# Altium PCB Business_Card.PcbDoc (part 2 of 2)
Units mm, origin at the board's own origin, x right, y up, seen from the top; angles counter-clockwise.
Board outline 85 x 55 mm, 4 copper layers (Top Layer (RF), Inner1 (GND), Inner2 (Signal), Bottom Layer (VCC)), stack 0.786 mm thick; 94 components, 61 nets, 338 pads, 147 vias.
Unrouted connection lines stored in the file: 1.
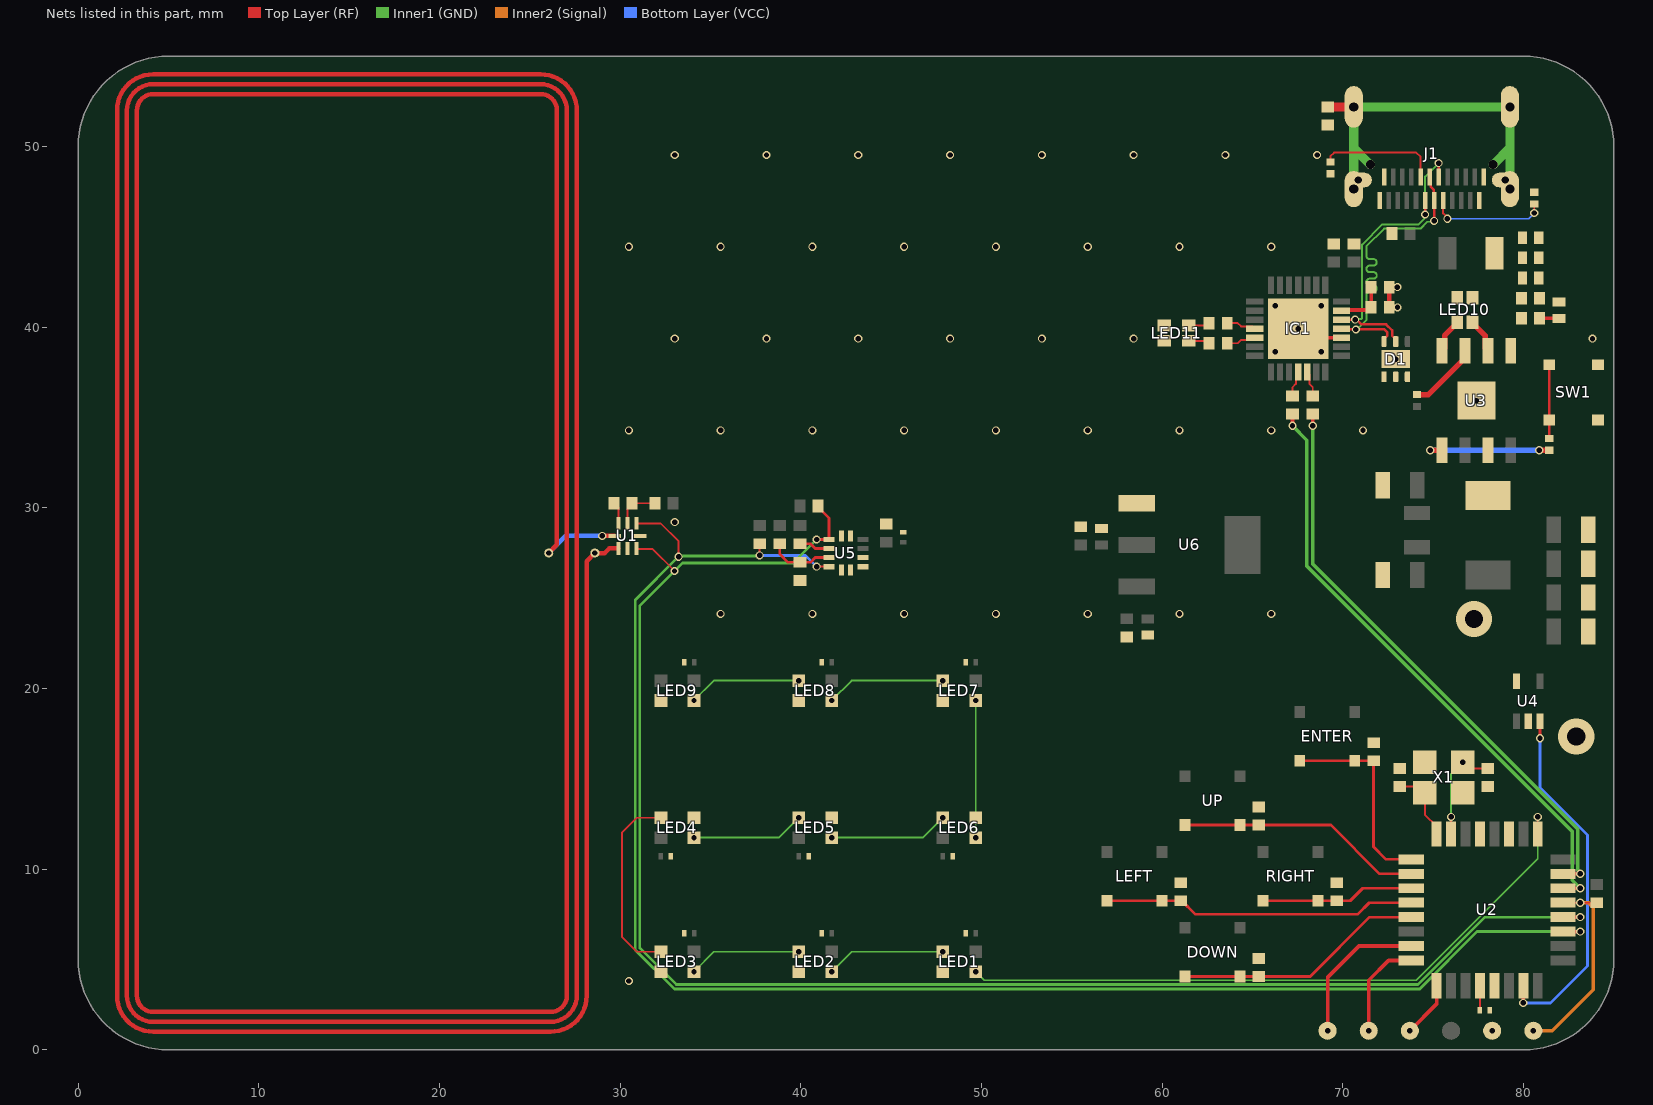
[diagram p4: the nets of this part, all layers, seen from the top]

## Via types
v1: diameter 0.45, hole 0.3, Top Layer (RF) to Bottom Layer (VCC), tented both sides, 143 vias
v2: diameter 2, hole 1, Top Layer (RF) to Bottom Layer (VCC), 4 vias

## Nets (pads, with @x,y where several pads share a name; then routed paths per layer and width w, separated by ;. In a path a pad name is that pad's centre, name@x,y a point inside that pad or via, vN(x,y) a via of type N, cw(c..) or ccw(c..) an arc to the next point about the centre after c; other vN are vias at no path point) (continued)
CHASIS: C19.1 J1.SH1 J1.SH2 J1.SH3 J1.SH4 J1.SH5 J1.SH6 | length 21.8
  Top Layer (RF) w0.508: C19.1@69.164,52.197 J1.SH4@70.607,52.197
  Inner1 (GND) w0.508: J1.SH2@70.607,47.647 70.608,49.917 ; J1.SH6@71.528,48.997 70.608,49.917 ; J1.SH5@78.328,48.997 79.248,49.917 ; J1.SH1@79.247,47.647 79.248,49.917 ; 70.608,49.917 J1.SH4@70.607,52.197 J1.SH3@79.247,52.197 79.248,49.917
D0: R3.1 U2.30 | length 33.8
  Top Layer (RF) w0.203: v1(67.217,34.542) R3.1@67.217,35.187 ; U2.30@82.19,8.944 U2.30@82.192,8.943 v1(83.14,8.943)
  Inner1 (GND) w0.203: v1(67.217,34.542) 68.01,33.749 68.01,26.784 82.702,12.091 82.702,9.381 v1(83.14,8.943)
D1: R2.1 U2.31 | length 32.5
  Top Layer (RF) w0.203: v1(68.334,34.542) R2.1@68.334,35.187 ; U2.31@82.19,9.744 U2.31@82.192,9.743 v1(83.14,9.743)
  Inner1 (GND) w0.203: v1(68.334,34.542) 68.334,26.89 83.007,12.217 83.007,9.943 83.14,9.81 v1(83.14,9.743)
D_N: D1.2 IC1.5 J1.A7 J1.B7 | length 17.2
  Top Layer (RF) w0.137: IC1.5@69.926,40.418 IC1.5@69.926,40.418 70.682,40.42 v1(70.684,40.421) ; v1@70.683,40.418 70.771,40.418 71.03,40.159 72.397,40.159 72.735,39.82 72.735,39.519 72.82,39.434 72.847,39.434 72.928,39.353 D1.2@72.928,39.207 ; v1(74.553,46.239) J1.A7@74.553,47.022 ; J1.B7@75.302,48.322 v1(75.302,49.08)
  Inner1 (GND) w0.109: v1(70.684,40.421) 70.706,40.444 71.02,40.444 71.072,40.495 71.072,42.566 71.072,43.301 71.072,44.576 72.19,45.695 74.203,45.695 74.488,45.979 74.488,46.174 v1(74.553,46.239) 74.553,48.331 v1(75.302,49.08)
D_P: D1.3 IC1.4 J1.A6 J1.B6 | length 17.5
  Top Layer (RF) w0.137: IC1.4@69.926,39.918 69.949,39.895 70.703,39.895 v1(70.726,39.871) 70.749,39.895 72.288,39.895 72.471,39.711 72.471,39.546 72.278,39.353 D1.3@72.278,39.207 ; J1.B6@74.802,48.322 74.858,48.266 74.858,47.791 75.031,47.617 75.031,47.042 J1.A6@75.052,47.022 ; v1(75.053,45.883) J1.A6@75.052,47.022
  Inner1 (GND) w0.109: v1(70.726,39.871) 70.781,39.871 71.307,40.397 71.307,41.359 71.307,41.777 cw(c71.489,41.777) 71.489,41.958 71.698,41.958 ccw(c71.698,42.139) 71.698,42.321 71.489,42.321 cw(c71.489,42.502) 71.489,42.683 71.698,42.683 ccw(c71.698,42.865) 71.698,43.046 71.489,43.046 cw(c71.489,43.227) 71.489,43.409 71.696,43.409 ccw(c71.696,43.59) 71.696,43.771 71.489,43.771 cw(c71.489,43.953) 71.307,43.953 71.307,44.478 72.288,45.459 74.3,45.459 74.679,45.837 75.003,45.837 75.005,45.835 v1(75.053,45.883)
DOWN: DOWN.2 R16.2 U2.13 | length 13.9
  Top Layer (RF) w0.152: DOWN.2@61.264,4.06 DOWN.2@64.314,4.06 R16.2@65.354,4.06 68.198,4.06 71.481,7.343 U2.13@73.792,7.343
ENTER: ENTER.2 R17.2 U2.9 | length 11.2
  Top Layer (RF) w0.152: ENTER.2@67.614,15.998 ENTER.2@70.664,15.998 R17.2@71.704,15.998 71.704,11.238 72.4,10.543 U2.9@73.792,10.543
FD: U1.4
GND: C1.2 C2.2 C3.2 C4.2 C5.2 C6.2 C7.2 C8.2 C9.2 C10.2 C11.2 C12.2 C13.2 C14.2 C15.2 C16.2 C17.2 C18.2 C19.2 C20.2 C21.2 C22.2 C23.2 C24.2 C25.2 C26.2 C27.2 C28.2 C29.2 C30.2 C31.2 C32.2 C33.2 C34.2 C35.2 D1.4 D1.5 D1.6 D1.7 IC1.3 IC1.29 J1.A1 J1.A12 J1.B1 J1.B12 LED1.2 LED2.2 LED3.2 LED4.2 LED5.2 LED6.2 LED7.2 LED8.2 LED9.2 LED10.3 LED10.4 LED11.3 LED11.4 PT3.1 R8.2 R9.2 R13.1 R14.1 R15.1 R16.1 R17.1 R23.1 SW1.2 U1.2 U2.3 U2.5 U2.21 U3.9 U4.2 U4.5 U5.5 U5.6 U5.7 U5.8 U6.1 X1.2 X1.4 | length 4.7
  Top Layer (RF) w0.203: v1(67.526,39.918) 68.026,39.418 IC1.3@69.926,39.418
  Top Layer (RF) w0.25: C29.2@72.559,42.226 72.564,42.221 C29.2@72.567,42.221 ; v1(73.02,42.216) 73.015,42.221 C29.2@72.567,42.221 ; v1(73.028,41.093) 73.023,41.098 72.572,41.098 C28.2@72.567,41.103 C29.2@72.567,42.221
  other v1: 78.267,1.056 30.48,3.81 35.56,24.13 40.64,24.13 45.72,24.13 50.8,24.13 55.88,24.13 60.96,24.13 66.04,24.13 33.02,29.21 30.48,34.29 35.56,34.29 40.64,34.29 45.72,34.29 50.8,34.29 55.88,34.29 60.96,34.29 66.04,34.29 71.12,34.29 77.39,35.919 72.928,38.232 66.256,38.648 68.796,38.648 33.02,39.37 38.1,39.37 43.18,39.37 48.26,39.37 53.34,39.37 58.42,39.37 83.82,39.37 66.256,41.188 68.796,41.188 30.48,44.45 35.56,44.45 40.64,44.45 45.72,44.45 50.8,44.45 55.88,44.45 60.96,44.45 66.04,44.45 33.02,49.53 38.1,49.53 43.18,49.53 48.26,49.53 53.34,49.53 58.42,49.53 63.5,49.53 68.58,49.53
  other v2: 82.923,17.348 77.256,23.851
INT1: U5.12
INT2: U5.11
KEY: R6.1 U3.5 | length 7.2
  Top Layer (RF) w0.305: v1(74.844,33.191) U3.5@75.489,33.191 ; v1(80.877,33.191) R6.1@81.4,33.191
  Bottom Layer (VCC) w0.305: v1(74.844,33.191) v1(80.877,33.191)
L1: LED10.2 U3.2 | length 1.9
  Top Layer (RF) w0.305: LED10.2@77.184,40.285 77.184,40.235 77.881,39.538 77.881,38.839 U3.2@78.029,38.691
L2: R5.2 U3.3 | length 3.9
  Top Layer (RF) w0.305: R5.2@74.113,36.268 74.736,36.268 76.759,38.291 U3.3@76.759,38.691
L3: LED10.1 U3.4 | length 1.9
  Top Layer (RF) w0.305: U3.4@75.489,38.691 75.636,38.839 75.636,39.538 76.334,40.235 LED10.1@76.334,40.285
LEFT: LEFT.2 R14.2 U2.12 | length 17.4
  Top Layer (RF) w0.152: LEFT.2@56.946,8.251 LEFT.2@59.996,8.251 R14.2@61.036,8.251 61.086,8.251 61.827,7.51 70.832,7.51 71.465,8.143 U2.12@73.792,8.143
MISO: PT5.1 U2.16 | length 5.6
  Top Layer (RF) w0.203: v1(71.436,1.056) 71.436,3.844 72.534,4.943 U2.16@73.792,4.943
MOSI: PT4.1 U2.15 | length 8.3
  Top Layer (RF) w0.203: v1(69.159,1.056) 69.159,4.002 70.9,5.743 U2.15@73.792,5.743
NetC13_1: C13.1 R4.2 | length 1.1
  Top Layer (RF) w0.203: R4.2@80.897,40.491 C13.1@81.97,40.491
NetIC1_18: IC1.18 R11.1 | length 1.7
  Top Layer (RF) w0.102: R11.1@63.602,40.227 64.184,40.227 64.368,40.042 65.001,40.042 IC1.18@65.126,39.918
NetIC1_19: IC1.19 R12.1 | length 1.7
  Top Layer (RF) w0.102: R12.1@63.602,39.109 64.184,39.109 64.368,39.294 65.001,39.294 IC1.19@65.126,39.418
NetJ1_A5: J1.A5 R8.1 | length 6.6
  Top Layer (RF) w0.102: J1.A5@75.552,47.022 75.553,46.302 75.788,46.067 v1(75.788,46.004) ; v1(80.597,46.32) R8.1@80.597,46.822
  Bottom Layer (VCC) w0.102: v1(75.788,46.004) 80.281,46.004 v1(80.597,46.32)
NetJ1_B5: J1.B5 R9.1 | length 6.6
  Top Layer (RF) w0.102: R9.1@69.317,49.147 69.317,49.469 69.514,49.667 74.063,49.667 74.303,49.427 J1.B5@74.302,48.322
NetL2_1: L2.1 U1.1 | length 1.4
  Top Layer (RF) w0.25: L2.1@28.6,27.5 29.145,27.5 29.398,27.753 U1.1@29.904,27.753
NetL2_2: L2.2 U1.8 | length 4.1
  Top Layer (RF) w0.25: v1(29.007,28.448) U1.8@29.709,28.448
  Bottom Layer (VCC) w0.25: v1(26.045,27.5) 26.993,28.448 v1(29.007,28.448)
  other v1: 28.6,27.5
NetLED1_1: LED1.1 LED2.3 | length 6.6
  Inner1 (GND) w0.102: v1(41.707,4.327) 42.807,5.427 v1(47.853,5.427)
NetLED2_1: LED2.1 LED3.3 | length 6.2
  Inner1 (GND) w0.102: v1(34.087,4.327) 35.187,5.427 v1(39.877,5.427)
NetLED3_1: LED3.1 LED4.3 | length 10.8
  Top Layer (RF) w0.102: LED3.1@32.257,5.427 30.921,5.427 30.099,6.248 30.099,12.014 30.928,12.844 LED4.3@32.257,12.844
NetLED4_1: LED4.1 LED5.3 | length 6.2
  Inner1 (GND) w0.102: v1(34.087,11.744) 38.777,11.744 v1(39.877,12.844)
NetLED5_1: LED5.1 LED6.3 | length 6.6
  Inner1 (GND) w0.102: v1(41.707,11.744) 46.753,11.744 v1(47.853,12.844)
NetLED6_1: LED6.1 LED7.3 | length 7.6
  Inner1 (GND) w0.102: v1(49.683,11.744) v1(49.683,19.338)
NetLED7_1: LED7.1 LED8.3 | length 6.6
  Inner1 (GND) w0.102: v1(41.707,19.338) 42.807,20.438 v1(47.853,20.438)
NetLED8_1: LED8.1 LED9.3 | length 6.2
  Inner1 (GND) w0.102: v1(34.087,19.338) 35.187,20.438 v1(39.877,20.438)
NetLED11_1: LED11.1 R12.2 | length 1.2
  Top Layer (RF) w0.102: LED11.1@61.478,39.243 62.468,39.243 R12.2@62.602,39.109
NetLED11_2: LED11.2 R11.2 | length 1.2
  Top Layer (RF) w0.102: LED11.2@61.478,40.093 62.468,40.093 R11.2@62.602,40.227
NetR1_1: R1.1 U1.7 | length 1.2
  Top Layer (RF) w0.102: R1.1@29.667,30.251 29.904,30.014 U1.7@29.904,29.143
NetR1_2: R1.2 R18.1 U1.6 | length 2.5
  Top Layer (RF) w0.102: U1.6@30.404,29.143 30.404,29.938 30.667,30.201 R1.2@30.667,30.251 ; R1.2@30.654,30.251 R1.2@30.667,30.251 ; R18.1@31.932,30.251 R1.2@30.667,30.251
NetR6_2: R6.2 SW1.1 | length 4.1
  Top Layer (RF) w0.152: R6.2@81.429,33.845 SW1.1@81.429,34.869 SW1.1@81.429,37.919
NetR19_2: R19.2 U5.2 | length 1.7
  Top Layer (RF) w0.152: R19.2@39.951,28.015 40.535,28.015 40.8,27.75 U5.2@41.563,27.75
NetR22_2: R22.2 R23.2 U5.3 | length 3.6
  Top Layer (RF) w0.152: R22.2@38.835,28.015 38.835,27.448 39.298,26.985 R23.2@39.951,26.985 40.535,26.985 40.8,27.25 U5.3@41.563,27.25
RIGHT: R15.2 RIGHT.2 U2.11 | length 8.5
  Top Layer (RF) w0.152: RIGHT.2@65.582,8.251 RIGHT.2@68.632,8.251 R15.2@69.672,8.251 70.412,8.251 71.104,8.943 U2.11@73.792,8.943
RST: PT1.1 R10.2 U2.29 | length 11.5
  Top Layer (RF) w0.102: U2.29@82.192,8.143 R10.2@84.049,8.143
  Inner2 (Signal) w0.203: v1(80.544,1.056) 81.6,1.056 83.864,3.32 83.864,7.879 83.602,8.141 v1(83.142,8.141)
RX: IC1.25 R3.2 | length 1.5
  Top Layer (RF) w0.102: R3.2@67.217,36.187 67.217,36.673 67.401,36.857 67.401,37.394 IC1.25@67.526,37.518
SCK: PT6.1 U2.17 | length 3.1
  Top Layer (RF) w0.203: v1(73.713,1.056) 75.192,2.535 U2.17@75.192,3.543
SCL: R20.2 U1.3 U2.28 U5.1 | length 91
  Top Layer (RF) w0.102: U1.3@30.904,27.753 30.941,27.753 30.963,27.731 31.781,27.731 v1(33.009,26.503)
  Top Layer (RF) w0.152: v1(40.87,28.25) U5.1@41.563,28.25 41.563,29.437 40.951,30.049 R20.2@40.951,30.099
  Top Layer (RF) w0.203: U2.28@82.19,7.344 U2.28@82.192,7.343 v1(83.14,7.343)
  Inner1 (GND) w0.152: v1(40.87,28.25) 39.569,26.949 33.455,26.949 31.09,24.584 31.09,5.637 33.107,3.619 74.152,3.619 77.875,7.343 v1(83.14,7.343)
SDA: R21.2 U1.5 U2.27 U5.4 | length 91
  Top Layer (RF) w0.102: U1.5@30.904,29.143 32.232,29.143 33.232,28.143 v1(33.232,27.296) ; v1(37.719,27.369) R21.2@37.719,28.015 ; v1(40.87,26.75) U5.4@41.563,26.75
  Top Layer (RF) w0.203: U2.27@82.19,6.544 U2.27@82.192,6.543 v1(83.14,6.543)
  Inner1 (GND) w0.152: v1(33.232,27.296) 30.836,24.9 30.836,5.532 33.002,3.365 74.257,3.365 77.434,6.543 v1(83.14,6.543) ; v1@33.268,27.333 37.682,27.333 v1(37.719,27.369)
  Bottom Layer (VCC) w0.152: v1(37.719,27.369) 40.251,27.369 v1(40.87,26.75)
SW: L1.1 U3.7
Temp: U2.23 U4.3 | length 20
  Top Layer (RF) w0.152: v1(80.915,17.248) U4.3@80.915,18.196
  Top Layer (RF) w0.203: v1(79.992,2.594) U2.23@79.992,3.543
  Bottom Layer (VCC) w0.152: v1(79.992,2.594) 81.49,2.594 83.544,4.649 83.544,11.892 80.915,14.521 v1(80.915,17.248)
TT01: LED1.3 U2.1 | length 37.4
  Top Layer (RF) w0.102: U2.1@80.792,11.943 U2.1@80.792,11.943 v1(80.793,12.893)
  Inner1 (GND) w0.102: v1(49.683,4.327) 50.162,3.848 74.057,3.848 80.793,10.584 v1(80.793,12.893)
TX: IC1.26 R2.2 | length 1.5
  Top Layer (RF) w0.102: IC1.26@68.026,37.518 68.15,37.394 68.15,36.857 68.334,36.673 R2.2@68.334,36.187
UP: R13.2 U2.10 UP.2 | length 13.6
  Top Layer (RF) w0.152: UP.2@61.264,12.442 UP.2@64.314,12.442 R13.2@65.354,12.442 69.339,12.442 72.039,9.743 U2.10@73.792,9.743
VDD: C28.1 C29.1 IC1.6 | length 2.8
  Top Layer (RF) w0.203: IC1.6@69.926,40.918 69.959,40.951 71.415,40.951 C28.1@71.567,41.103 C29.1@71.567,42.221
VIN: C5.1 C6.1 C7.1 C8.1 FB1.2 R4.1 U3.1
VREF: C3.1 U2.20 | length 1.4
  Top Layer (RF) w0.102: C3.1@77.592,2.186 U2.20@77.592,3.543
XTAL1: C17.1 U2.7 X1.3 | length 5.8
  Top Layer (RF) w0.102: U2.7@75.992,11.943 v1(75.992,12.893) ; v1(76.641,15.927) 76.991,15.577 C17.1@78.029,15.577
  Inner1 (GND) w0.102: v1(75.992,12.893) 75.992,15.278 v1(76.641,15.927)
XTAL2: C16.1 U2.8 X1.1 | length 4.1
  Top Layer (RF) w0.102: C16.1@73.152,14.577 74.191,14.577 X1.1@74.541,14.227 74.541,13.019 75.192,12.368 U2.8@75.192,11.943
pads on no net: IC1.1 IC1.2 IC1.9 IC1.10 IC1.11 IC1.12 IC1.13 IC1.14 IC1.15 IC1.16 IC1.17 IC1.20 IC1.21 IC1.22 IC1.23 IC1.24 IC1.27 IC1.28 J1.A2 J1.A3 J1.A8 J1.A10 J1.A11 J1.B2 J1.B3 J1.B8 J1.B10 J1.B11 LED9.1 U2.2 U2.14 U2.19 U2.22 U2.24 U2.25 U2.26 U2.32 U4.1

## Polygon pours and split planes (outlines as drawn)
3V3_IN on Top Layer (RF) "3V3_IN_L01_P004" (solid, pour order 4): 37.047,28.715 40.301,28.715 40.301,30.717 37.688,30.717 37.047,30.076
3V3_IN on Top Layer (RF) "3V3_IN_L01_P005" (solid, pour order 5): 57.417,28.673 60.652,28.673 63.379,31.4 66.04,31.4 66.04,24.5 63.409,24.5 60.681,27.229 54.889,27.229 54.889,28.25 56.993,28.25
3V3_IN on Top Layer (RF) "3V3_IN_L01_P006" (solid, pour order 6): 44.13,27.524 44.595,27.06 46.389,27.06 46.595,27.266 46.595,28.135 46.33,28.4 43.137,28.4 43.137,27.524
5V_USB on Top Layer (RF) "Top Layer (RF)-5V_USB" (solid, remove dead copper, pour order 7): 76.179,46.547 76.677,46.049 76.677,43.098 76.302,42.723 75.014,42.723 74.479,42.188 74.479,39.014 74.196,38.732 73.358,38.732 73.358,40.777 72.892,41.243 70.74,41.243 69.451,41.243 69.451,41.593 69.201,41.843 68.851,41.843 68.851,44.128 68.914,44.192 72.993,44.192 73.427,44.625 73.427,47.596 73.678,47.847 73.678,48.796 73.927,48.796 73.927,47.718 73.678,47.469 73.678,46.547 73.885,46.34 75.824,46.34 75.929,46.445 75.929,47.598 76.179,47.848 76.179,48.797 76.303,48.797 76.303,48.789 76.31,48.796 76.428,48.796 76.428,47.709 76.179,47.46
5V_IN on Top Layer (RF) "5V_IN_L01_P008" (solid, pour order 8): 82.627,22.504 82.627,21.876 82.937,21.566 83.565,21.566 84.104,21.027 84.104,19.765 83.635,19.296 80.907,19.296 80.394,19.809 80.394,22.027 80.348,22.073 79.025,22.073 78.715,22.383 78.715,24.18 79.001,24.466 80.723,24.466 80.971,24.714 80.971,30.586 79.476,32.081 79.21,32.081 78.999,32.292 78.999,34.143 79.146,34.291 80.114,34.291 80.307,34.098 80.307,33.309 82.627,30.989 82.627,24.407
BAT on Top Layer (RF) "BAT_L01_P010" (solid, pour order 10): 75.189,31.435 75.815,32.061 76.879,32.061 77.059,32.241 77.059,33.891 77.059,34.157 76.814,34.401 75.087,34.401 74.844,34.644 74.844,35.814 73.609,35.814 73.098,35.303 73.098,28.956 75.189,28.956
SW on Top Layer (RF) "SW_L01_P015" (solid, pour order 15): 77.394,34.291 77.394,32.334 76.848,31.788 76.459,31.788 76.459,29.53 79.571,29.53 79.571,31.788 79.21,31.788 78.625,32.373 78.625,34.291
BAT+ on Top Layer (RF) "BAT+_L01_P023" (solid, pour order 23): 76.079,25.178 75.31,24.408 75.31,23.394 74.664,22.749 73.65,22.749 73.098,23.301 73.098,28.463 73.19,28.554 79.309,28.554 79.862,28.001 79.862,25.365 79.675,25.178
VIN on Top Layer (RF) "VIN_L01_P024" (solid, pour order 24): 78.703,39.641 78.703,37.785 78.83,37.658 80.089,37.658 80.197,37.766 80.197,45.583 80.12,45.66 77.96,45.66 77.903,45.603 77.903,40.441
GND on Top Layer (RF) "GND_L01_P025" (solid, pour order 25): 29.154,0 29.154,55 80,55 cw(c80,50) 85,50 85,5 cw(c80,5) 80,0
GND on Inner1 (GND) "GND_L02_P022" (solid, pour order 22): 29.154,0 29.154,55 80,55 cw(c80,50) 85,50 85,5 cw(c80,5) 80,0
3V3_IN on Inner2 (Signal) "3V3_IN_L03_P002" (solid, pour order 2): 37.392,29.964 37.583,29.772 41.765,29.772 45.27,26.267 65.345,26.267 65.536,26.459 65.536,29.441 64.244,30.734 37.551,30.734 37.392,30.575
BAT+ on Inner2 (Signal) "BAT+_L03_P013" (solid, pour order 13): 76.079,25.178 75.31,24.408 75.31,23.394 74.664,22.749 73.65,22.749 73.098,23.301 73.098,28.463 73.19,28.554 79.309,28.554 79.862,28.001 79.862,25.365 79.675,25.178
5V_IN on Inner2 (Signal) "5V_IN_L03_P019" (solid, pour order 19): 62.357,20.803 59.52,23.64 59.52,24.685 59.328,24.877 57.904,24.877 57.712,24.685 57.712,23.651 54.864,20.803 32.9,20.803 31.75,19.653 31.75,6.198 32.791,5.156 50.495,5.156 51.46,6.121 74.321,6.121 75.664,4.779 75.664,0.921 75.855,0.73 76.125,0.73 78.72,3.324 78.72,12.473 80.322,14.075 81.01,14.075 83.722,11.362 83.722,9.473 83.913,9.281 84.184,9.281 84.375,9.473 84.375,11.766 84.375,20.908 80.817,24.466 79.001,24.466 78.72,24.185 78.72,22.129 77.394,20.803
GND on Inner2 (Signal) "GND_L03_P026" (solid, pour order 26): 29.159,0 29.159,55 80,55 cw(c80,50) 85,50 85,5 cw(c80,5) 80,0
GND on Bottom Layer (VCC) "GND_L04_P021" (solid, pour order 21): 29.159,0 29.159,55 80,55 cw(c80,50) 85,50 85,5 cw(c80,5) 80,0

## Keep-outs
Keep-Out Layer:
  the board outline again, w0.254

## Other copper
Top Layer (RF):
  pour cut-out: 84.325,42.596 82.042,42.596 82.042,49.822 84.325,49.822
  text "1" at 83.922,42.951 h1.52 r90
Inner1 (GND):
  pour cut-out: 84.325,42.596 82.042,42.596 82.042,49.822 84.325,49.822
  text "2" at 83.922,44.451 h1.52 r90
Inner2 (Signal):
  pour cut-out: 84.325,42.596 82.042,42.596 82.042,49.822 84.325,49.822
  text "3" at 83.922,46.451 h1.52 r90
Bottom Layer (VCC):
  pour cut-out: 84.325,42.596 82.042,42.596 82.042,49.822 84.325,49.822
  text "4" at 83.922,48.451 h1.52 r90

## Silkscreen, mask and mechanical layers (free items; w line width, h text height)
Top Overlay:
  drawing of 54 lines, arcs and shapes, not listed
  text "Emmanuel Plascencia" at 2.018,50.137 h6
  text "Docteur en ingénierie / Développeur Systèmes Embarqués" at 2.018,47.028 h3
  text "(+33) 07 69 89 76 27" at 4.431,43.071 h3
  text "RX" at 60.174,40.811 h0.51
  text "Charge" at 75.387,39.743 h0.51 r90
  text "TX" at 60.174,38.042 h0.51
  text "Z" at 47.955,33.579 h1.52
  text "Y" at 42.576,31.725 h1.52
  text "X" at 49.428,28.753 h1.52
  text "NFC" at 21.786,26.883 h2
  text "B+" at 73.785,22.022 h0.51
  text "B-" at 76.833,22.022 h0.51
  text "5V" at 84.684,19.973 h0.51 r90
  text "GND" at 84.684,16.671 h0.51 r90
  text "Demo Board  Rev_A" at 46.413,0.51 h2
Bottom Overlay:
  drawing of 111 lines, arcs and shapes, not listed
  text "Customize your own business card" at 27.038,1.084 h2
Top Solder:
  region: 1387 vertices and 1 holes, not listed, extent 29.479,1.321 54.525,26.529
Drill Drawing:
  circle w0.254: c2.79,83.27 r0.847
  lines w0.254: 1.943,70.993 3.637,70.993 3.637,72.686 1.943,72.686 1.943,70.993 ; 1.943,76.496 3.637,76.496 2.79,74.803 1.943,76.496 ; 1.943,79.036 2.367,79.036 2.79,78.613 3.213,79.036 3.637,79.036 3.213,79.46 3.637,79.883 3.213,79.883 2.79,80.306 2.367,79.883 1.943,79.883 2.367,79.46 1.943,79.036 ; 1.943,86.233 2.79,86.656 3.637,86.233 3.213,87.08 3.637,87.926 2.79,87.503 1.943,87.926 2.367,87.08 1.943,86.233 ; 1.943,90.043 1.943,90.466 2.367,90.89 1.943,91.313 1.943,91.736 2.367,91.736 2.79,91.313 3.213,91.736 3.637,91.736 3.637,91.313 3.213,90.89 3.637,90.466 3.637,90.043 3.213,90.043 2.79,90.466 2.367,90.043 1.943,90.043
  lines w0.381: 0.425,69.85 177.465,69.85 ; 0.425,92.71 177.465,92.71 ; 14.417,66.04 14.417,96.52 ; 29.399,66.04 29.399,96.52 ; 57.077,66.04 57.077,96.52 ; 69.926,66.04 69.926,96.52 ; 88.565,66.04 88.565,96.52 ; 90.491,23.533 100.903,23.533 130.105,23.533 151.943,23.533 168.449,23.533 182.923,23.533 ; 90.491,26.581 100.903,26.581 130.105,26.581 151.943,26.581 168.449,26.581 182.923,26.581 ; 90.491,29.629 100.903,29.629 130.105,29.629 151.943,29.629 168.449,29.629 182.923,29.629 ; 90.491,32.677 100.903,32.677 130.105,32.677 151.943,32.677 168.449,32.677 182.923,32.677 ; 90.491,35.725 100.903,35.725 130.105,35.725 151.943,35.725 168.449,35.725 182.923,35.725 ; 90.491,38.773 100.903,38.773 130.105,38.773 151.943,38.773 168.449,38.773 182.923,38.773 ; 90.491,41.821 100.903,41.821 130.105,41.821 151.943,41.821 168.449,41.821 182.923,41.821 ; 90.491,44.869 100.903,44.869 130.105,44.869 151.943,44.869 168.449,44.869 182.923,44.869 ; 90.491,47.917 100.903,47.917 130.105,47.917 151.943,47.917 168.449,47.917 182.923,47.917 ; 90.491,50.965 100.903,50.965 130.105,50.965 151.943,50.965 168.449,50.965 182.923,50.965 ; 90.491,54.013 182.923,54.013 ; 100.903,57.061 100.903,20.485 ; 130.105,57.061 130.105,20.485 ; 142.396,66.04 142.396,96.52 ; 151.943,57.061 151.943,20.485 ; 157.378,66.04 157.378,96.52 ; 168.449,57.061 168.449,20.485 ; 100.903,20.485 130.105,20.485 ; 100.903,20.485 90.491,20.485 90.491,57.061 182.923,57.061 182.923,20.485 168.449,20.485 ; 130.105,20.485 151.943,20.485 ; 151.943,20.485 168.449,20.485 ; 0.425,66.04 177.465,66.04 177.465,96.52 0.425,96.52 0.425,66.04
  text "Symbol" at 2.711,93.853 h1.83
  text "Count" at 15.56,93.853 h1.83
  text "Hole Size" at 30.542,93.853 h1.83
  text "Plated" at 58.22,93.853 h1.83
  text "Hole Type" at 71.069,93.853 h1.83
  text "Drill Layer Pair" at 89.708,93.853 h1.83
  text "Via/Pad" at 143.539,93.853 h1.83
  text "Pad Shape" at 158.521,93.853 h1.83
  text "142" at 15.56,90.043 h1.52
  text "0.300mm (11.81mil)" at 30.542,90.043 h1.52
  text "PTH" at 58.22,90.043 h1.52
  text "Round" at 71.069,90.043 h1.52
  text "Top Layer (RF) - Bottom Layer (VCC)" at 89.708,90.043 h1.52
  text "Via" at 143.539,90.043 h1.52
  text "Rounded" at 158.521,90.043 h1.52
  text "4" at 15.56,86.233 h1.52
  text "1.000mm (39.37mil)" at 30.542,86.233 h1.52
  text "PTH" at 58.22,86.233 h1.52
  text "Round" at 71.069,86.233 h1.52
  text "Top Layer (RF) - Bottom Layer (VCC)" at 89.708,86.233 h1.52
  text "Via" at 143.539,86.233 h1.52
  text "Rounded" at 158.521,86.233 h1.52
  text "2" at 15.56,82.423 h1.52
  text "0.400mm (15.75mil)" at 30.542,82.423 h1.52
  text "PTH" at 58.22,82.423 h1.52
  text "Slot" at 71.069,82.423 h1.52
  text "Top Layer (RF) - Bottom Layer (VCC)" at 89.708,82.423 h1.52
  text "Pad" at 143.539,82.423 h1.52
  text "Rounded" at 158.521,82.423 h1.52
  text "2" at 15.56,78.613 h1.52
  text "0.500mm (19.69mil)" at 30.542,78.613 h1.52
  text "PTH" at 58.22,78.613 h1.52
  text "Round" at 71.069,78.613 h1.52
  text "Top Layer (RF) - Bottom Layer (VCC)" at 89.708,78.613 h1.52
  text "Pad" at 143.539,78.613 h1.52
  text "Rounded" at 158.521,78.613 h1.52
  text "2" at 15.56,74.803 h1.52
  text "0.500mm (19.69mil)" at 30.542,74.803 h1.52
  text "PTH" at 58.22,74.803 h1.52
  text "Slot" at 71.069,74.803 h1.52
  text "Top Layer (RF) - Bottom Layer (VCC)" at 89.708,74.803 h1.52
  text "Pad" at 143.539,74.803 h1.52
  text "Rounded" at 158.521,74.803 h1.52
  text "2" at 15.56,70.993 h1.52
  text "0.500mm (19.69mil)" at 30.542,70.993 h1.52
  text "PTH" at 58.22,70.993 h1.52
  text "Slot" at 71.069,70.993 h1.52
  text "Top Layer (RF) - Bottom Layer (VCC)" at 89.708,70.993 h1.52
  text "Pad" at 143.539,70.993 h1.52
  text "Rounded" at 158.521,70.993 h1.52
  text "154 Total" at 15.56,67.183 h1.52
  text "Slot definitions :" at 2.711,63.501 h1.52
  text "Routed Path Length" at 28.941,63.501 h1.52
  text "= Calculated from tool start centre position to tool end centre position." at 56.949,63.501 h1.52
  text "Hole Length" at 28.941,60.961 h1.52
  text "= Routed Path Length + Tool Size = Slot length as defined in the PCB layout" at 46.538,60.961 h1.52
  text "Layer" at 92.269,54.775 h1.52
  text "Name" at 102.681,54.775 h1.52
  text "Material" at 131.883,54.775 h1.52
  text "Thickness" at 153.721,54.775 h1.52
  text "Constant" at 170.227,54.775 h1.52
  text "Top Overlay" at 102.681,51.727 h1.52
  text "Top Solder" at 102.681,48.679 h1.52
  text "Solder Resist" at 131.883,48.679 h1.52
  text "0.010mm" at 153.721,48.679 h1.52
  text "3.5" at 170.227,48.679 h1.52
  text "1" at 92.269,45.631 h1.52
  text "Top Layer (RF)" at 102.681,45.631 h1.52
  text "CF-004" at 131.883,45.631 h1.52
  text "0.035mm" at 153.721,45.631 h1.52
  text "Dielectric 1" at 102.681,42.583 h1.52
  text "PP-006" at 131.883,42.583 h1.52
  text "0.203mm" at 153.721,42.583 h1.52
  text "4.1" at 170.227,42.583 h1.52
  text "2" at 92.269,39.535 h1.52
  text "Inner1 (GND)" at 102.681,39.535 h1.52
  text "0.030mm" at 153.721,39.535 h1.52
  text "Dielectric 5" at 102.681,36.487 h1.52
  text "Core-009" at 131.883,36.487 h1.52
  text "0.250mm" at 153.721,36.487 h1.52
  text "4.5" at 170.227,36.487 h1.52
  text "3" at 92.269,33.439 h1.52
  text "Inner2 (Signal)" at 102.681,33.439 h1.52
  text "0.030mm" at 153.721,33.439 h1.52
  text "Dielectric 3" at 102.681,30.391 h1.52
  text "PP-006" at 131.883,30.391 h1.52
  text "0.203mm" at 153.721,30.391 h1.52
  text "4.1" at 170.227,30.391 h1.52
  text "4" at 92.269,27.343 h1.52
  text "Bottom Layer (VCC)" at 102.681,27.343 h1.52
  text "CF-004" at 131.883,27.343 h1.52
  text "0.035mm" at 153.721,27.343 h1.52
  text "Bottom Solder" at 102.681,24.295 h1.52
  text "Solder Resist" at 131.883,24.295 h1.52
  text "0.010mm" at 153.721,24.295 h1.52
  text "3.5" at 170.227,24.295 h1.52
  text "Bottom Overlay" at 102.681,21.247 h1.52
  text "Total board thickness:" at 92.269,18.199 h1.52
  text "0.806mm" at 153.721,18.199 h1.52

## Dimensions
80,55 to 80,0 on Drill Drawing
0,50 to 85,50 on Drill Drawing